# EAGLE board CT_schematic (EAGLE 7.6.0)

Size 100 x 80 mm. Coordinates in mm from the lower left corner, seen from the top.
Outline: 0,0 100,0 100,80 0,80 0,0
Copper layers (1*16): Top 0.035mm / dielectric 1.5mm / Bottom 0.035mm
Design rules "default": minimum track width 10mil, minimum drill 24mil, track to track 8mil, track to pad 8mil, pad to pad 8mil, via to via 8mil, smd to smd 8mil, copper to edge 40mil, drill to drill 8mil, minimum pad ring 10mil, minimum via ring 8mil, stop-mask expansion 4mil, vias tented up to drill 0mil, thermal gap 10mil

## Footprints (pad centres in the part's own frame; a part is rotated, then mirrored left to right if it is on the bottom)
C0603 = smd 0.8 x 0.8: 1 -0.762,0; 2 0.762,0
C0402 = smd 0.5 x 0.5: 1 -0.508,0; 2 0.508,0
C0805 = smd 1.2 x 1.3: 1 -1.016,0; 2 1.016,0
EXV-9B = smd 2.718 x 1.778: 1 -2.108,0; 2 2.108,0
EXV-9H = smd 3.505 x 1.676: 1 -2.857,0; 2 2.857,0
PJ-037B_PACKAGE = drill 3.7 square: 1 12,0 | drill 3.2 square: 2 6,0
R0603 = smd 0.8 x 0.8: 1 -0.762,0; 2 0.762,0
UFBGA100 = smd 0.28 x 0.28: A1 -2.75,2.75; A2 -2.25,2.75; A3 -1.75,2.75; A4 -1.25,2.75; A5 -0.75,2.75; A6 -0.25,2.75; A7 0.25,2.75; A8 0.75,2.75; A9 1.25,2.75; A10 1.75,2.75; A11 2.25,2.75; A12 2.75,2.75; B1 -2.75,2.25; B2 -2.25,2.25; B3 -1.75,2.25; B4 -1.25,2.25; B5 -0.75,2.25; B6 -0.25,2.25; B7 0.25,2.25; B8 0.75,2.25; B9 1.25,2.25; B10 1.75,2.25; B11 2.25,2.25; B12 2.75,2.25; C1 -2.75,1.75; C2 -2.25,1.75; C3 -1.75,1.75; C4 -1.25,1.75; C5 -0.75,1.75; C8 0.75,1.75; C9 1.25,1.75; C10 1.75,1.75; C11 2.25,1.75; C12 2.75,1.75; D1 -2.75,1.25; D2 -2.25,1.25; D3 -1.75,1.25; D10 1.75,1.25; D11 2.25,1.25; D12 2.75,1.25; E1 -2.75,0.75; E2 -2.25,0.75; E3 -1.75,0.75; E10 1.75,0.75; E11 2.25,0.75; E12 2.75,0.75; F1 -2.75,0.25; F2 -2.25,0.25; F11 2.25,0.25; F12 2.75,0.25; G1 -2.75,-0.25; G2 -2.25,-0.25; G11 2.25,-0.25; G12 2.75,-0.25; H1 -2.75,-0.75; H2 -2.25,-0.75; H3 -1.75,-0.75; H10 1.75,-0.75; H11 2.25,-0.75; H12 2.75,-0.75; J1 -2.75,-1.25; J2 -2.25,-1.25; J3 -1.75,-1.25; J10 1.75,-1.25; J11 2.25,-1.25; J12 2.75,-1.25; K1 -2.75,-1.75; K2 -2.25,-1.75; K3 -1.75,-1.75; K4 -1.25,-1.75; K5 -0.75,-1.75; K8 0.75,-1.75; K9 1.25,-1.75; K10 1.75,-1.75; K11 2.25,-1.75; K12 2.75,-1.75; L1 -2.75,-2.25; L2 -2.25,-2.25; L3 -1.75,-2.25; L4 -1.25,-2.25; L5 -0.75,-2.25; L6 -0.25,-2.25; L7 0.25,-2.25; L8 0.75,-2.25; L9 1.25,-2.25; L10 1.75,-2.25; L11 2.25,-2.25; L12 2.75,-2.25; M1 -2.75,-2.75; M2 -2.25,-2.75; M3 -1.75,-2.75; M4 -1.25,-2.75; M5 -0.75,-2.75; M6 -0.25,-2.75; M7 0.25,-2.75; M8 0.75,-2.75; M9 1.25,-2.75; M10 1.75,-2.75; M11 2.25,-2.75; M12 2.75,-2.75
MOLEX_47219-2001 = smd 0.8 x 1.5: 1 3.2,-2.1; 2 2.1,-2.1; 3 1,-2.1; 4 -0.1,-2.1; 5 -1.2,-2.1; 6 -2.3,-2.1; 7 -3.4,-2.1; 8 -4.5,-2.1 | smd 1.5 x 2.05: G1 6.875,-4.7; G2 6.875,3.6; G3 -6.875,3.6; G4 -6.875,-4.7
ATBTLC1000-MR110CA = smd 2 x 0.5: 1 -7.2,2.7; 2 -7.2,1.8; 3 -7.2,0.9; 4 -7.2,0; 5 -7.2,-0.9; 6 -7.2,-1.8; 7 -7.2,-2.7; 8 -7.2,-3.6; 17 3.6,-3.6; 18 3.6,-2.7; 19 3.6,-1.8; 20 3.6,-0.9; 21 3.6,0; 22 3.6,0.9; 23 3.6,1.8; 24 3.6,2.7 | smd 0.5 x 2: 9 -4.255,-6.824; 10 -3.355,-6.824; 11 -2.455,-6.824; 12 -1.555,-6.824; 13 -0.655,-6.824; 14 0.245,-6.824; 15 1.145,-6.824; 16 2.045,-6.824 | smd 2.7 x 2.7: 25 -1.261,-0.328
WFDN-8 = smd 0.48 x 0.7: 1 0,0; 2 1.27,0; 3 2.54,0; 4 3.81,0; 5 3.81,4.45; 6 2.54,4.45; 7 1.27,4.45; 8 0,4.45 | smd 4 x 3: 9 1.89,2.25
ABS07-32.768KHZ-7-T = smd 1.1 x 2.4: 1 -2.5,0; 2 0,0
ASFL1 = smd 1.7 x 1.5: 1 -1.27,-1.1; 2 1.27,-1.1; 3 1.27,1.1; 4 -1.27,1.1
LP2954 = smd 1.6 x 0.6: 1 -2.475,1.905 | smd 1.55 x 0.6: 2 -2.475,0.635; 3 -2.475,-0.635; 4 -2.475,-1.905; 5 2.475,-1.905; 6 2.475,-0.635; 7 2.475,0.635; 8 2.475,1.905
SON-6 = smd 0.55 x 0.3: 1 -0.355,0.5 | smd 0.52 x 0.3: 2 -0.37,0; 3 -0.37,-0.5; 4 0.37,-0.5; 5 0.37,0; 6 0.37,0.5
SW_4-1437565-2 = smd 1.4 x 2.1: 1 -2.23,4.55; 2 -2.23,-4.55; 3 2.23,4.55; 4 2.23,-4.55
LGM67K-G1J2-24-Z = smd 0.8 x 1.4: A -2,0; C 0,0
NC7SZ125M5X = smd 1.3 x 0.7: 1 -1.3,0.95; 2 -1.3,0; 3 -1.3,-0.95; 4 1.3,-0.95; 5 1.3,0.95
DUMMY_PACKAGE_132 = drill 0.3: 1 0,-1; 2 1.5,-1

## Placement (x,y rotation side)
C1  1e-06  [C0603]  -22.86,64.77 0 top  (outside the outline)
C2  1e-07  [C0603]  -26.67,64.77 0 top  (outside the outline)
C3  1e-07  [C0603]  -30.48,64.77 0 top  (outside the outline)
C4  1e-07  [C0603]  -34.29,64.77 0 top  (outside the outline)
C5  1e-07  [C0603]  -38.1,64.77 0 top  (outside the outline)
C6  1e-07  [C0603]  -41.91,64.77 0 top  (outside the outline)
C7  1e-07  [C0603]  -45.72,64.77 0 top  (outside the outline)
C8  4.7e-06  [C0603]  -19.05,64.77 0 top  (outside the outline)
C9  1e-08  [C0603]  -49.53,64.77 0 top  (outside the outline)
C10  1e-06  [C0603]  -53.34,64.77 0 top  (outside the outline)
C11  1e-11  [C0402]  -68.58,64.77 0 top  (outside the outline)
C12  1e-11  [C0402]  -15.24,69.85 0 top  (outside the outline)
C13  1e-07  [C0402]  -19.05,69.85 0 top  (outside the outline)
C14  1e-05  [C0805]  -15.24,54.61 0 top  (outside the outline)
C15  1e-05  [C0805]  -20.32,54.61 0 top  (outside the outline)
C16  1e-05  [C0805]  -25.4,54.61 0 top  (outside the outline)
C17  1e-07  [C0402]  -22.86,69.85 0 top  (outside the outline)
C18  1e-08  [C0402]  -26.67,69.85 0 top  (outside the outline)
C19  1e-06  [EXV-9B]  -49.53,46.99 0 top  (outside the outline)
C20  2.2e-06  [EXV-9B]  -58.42,46.99 0 top  (outside the outline)
C21  1e-07  [C0402]  -30.48,69.85 0 top  (outside the outline)
C22  0.0001  [EXV-9H]  -52.07,38.1 0 top  (outside the outline)
C23  0.0001  [EXV-9H]  -63.5,38.1 0 top  (outside the outline)
C24  1e-08  [C0402]  -34.29,69.85 0 top  (outside the outline)
J1  PJ-037B  [PJ-037B_PACKAGE]  -69.85,7.62 0 top  (outside the outline)
R2  1000.0  [R0603]  -57.15,64.77 0 top  (outside the outline)
R4  4700.0  [R0603]  -60.96,64.77 0 top  (outside the outline)
R5  10000.0  [R0603]  -50.8,59.69 0 top  (outside the outline)
R6  100000.0  [R0603]  -35.56,54.61 0 top  (outside the outline)
R7  100000.0  [R0603]  -40.64,54.61 0 top  (outside the outline)
R8  100000.0  [R0603]  -45.72,54.61 0 top  (outside the outline)
R9  100000.0  [R0603]  -50.8,54.61 0 top  (outside the outline)
R10  100000.0  [R0603]  -55.88,54.61 0 top  (outside the outline)
R11  100000.0  [R0603]  -60.96,54.61 0 top  (outside the outline)
R12  10000.0  [R0603]  -55.88,59.69 0 top  (outside the outline)
R13  10000.0  [R0603]  -60.96,59.69 0 top  (outside the outline)
R14  100000.0  [R0603]  -66.04,54.61 0 top  (outside the outline)
R15  100000.0  [R0603]  -15.24,59.69 0 top  (outside the outline)
R16  100000.0  [R0603]  -20.32,59.69 0 top  (outside the outline)
R17  100000.0  [R0603]  -25.4,59.69 0 top  (outside the outline)
R18  100000.0  [R0603]  -30.48,59.69 0 top  (outside the outline)
R19  164658.62  [R0603]  -30.48,54.61 0 top  (outside the outline)
R20  100000.0  [R0603]  -35.56,59.69 0 top  (outside the outline)
R21  10000.0  [R0603]  -66.04,59.69 0 top  (outside the outline)
R22  10000.0  [R0603]  -15.24,64.77 0 top  (outside the outline)
R23  9100.0  [R0603]  -64.77,64.77 0 top  (outside the outline)
R24  680000.0  [R0603]  -40.64,59.69 0 top  (outside the outline)
R25  120000.0  [R0603]  -45.72,59.69 0 top  (outside the outline)
U1  STM32L431VCI6  [UFBGA100]  -44.45,27.94 0 top  (outside the outline)
U2  0472192001  [MOLEX_47219-2001]  -44.45,8.89 0 top  (outside the outline)
U3  ATBTLC1000-MR110CA  [ATBTLC1000-MR110CA]  -17.78,8.89 0 top  (outside the outline)
U4  SST26VF032B-104I/MF  [WFDN-8]  -66.04,25.4 0 top  (outside the outline)
U5  ABS07-32.768KHZ-7-T  [ABS07-32.768KHZ-7-T]  -27.94,48.26 0 top  (outside the outline)
U6  ASFL1-25MHZ-NCS  [ASFL1]  -43.18,38.1 0 top  (outside the outline)
U7  LP2954AIMX/NOPB  [LP2954]  -25.4,39.37 0 top  (outside the outline)
U8  TPS3895ADRYR  [SON-6]  -41.91,68.58 0 top  (outside the outline)
U9  4-1437565-2  [SW_4-1437565-2]  -27.94,27.94 0 top  (outside the outline)
U10  Q65110A2395  [LGM67K-G1J2-24-Z]  -36.83,46.99 0 top  (outside the outline)
U11  nc7sz125m5x  [NC7SZ125M5X]  -66.04,45.72 0 top  (outside the outline)
U12  Dummy  [DUMMY_PACKAGE_132]  -39.37,69.85 0 top  (outside the outline)

## Library data of the parts
C1-C24 J1 R2 R4-R25 U1-U12 = circuit_tree

## Nets
CLK_CRYSTAL_U1_D1: C11.1 U1.D1 U5.1
CLK_CRYSTAL_U1_E1: C12.1 U1.E1 U5.2
CLK_U1_F1: U1.F1 U6.3
GND: C1.2 C2.2 C3.2 C4.2 C5.2 C6.2 C7.2 C8.2 C9.2 C10.2 C11.2 C12.2 C13.2 C14.2 C15.2 C16.2 C17.2 C18.2 C19.2 C20.2 C21.2 C22.2 C23.2 C24.2 J1.2 R2.2 R5.2 R20.2 R23.2 R25.2 U1.D3 U1.E3 U1.F2 U1.F11 U1.F12 U1.J1 U1.K1 U2.6 U2.G1 U2.G2 U2.G3 U2.G4 U3.1 U3.9 U3.13 U3.24 U3.25 U4.4 U4.9 U6.2 U7.4 U8.2 U10.C U11.1 U11.3 U12.1
NET_U1_A4: R5.1 U1.A4
NET_U1_H2: R4.1 U1.H2 U11.4
NET_U1_M1: U1.L1 U1.M1
NET_U1_M11: U10.A
NET_U1_M12: U9.3 U9.4
NET_U3_17: R12.1 U3.17
NET_U3_20: R13.1 U3.20
NET_U7_3: R18.1 U7.3
NET_U7_5: R17.1 U7.5
NET_U7_7: R19.2 R20.1 U7.7
NET_U8_1: R22.1 R23.1 U8.1
NET_U8_3: R24.2 R25.1 U8.3
NET_U8_4: R21.1 U8.4 U11.2
NET_U9_1: R2.1 U9.1 U9.2
PROC_DAC1_OUT2: U1.K4 U12.2
PROC_QUADSPI_BK1_IO0: U1.L9 U4.5
PROC_QUADSPI_BK1_IO1: U1.M5 U4.2
PROC_QUADSPI_BK1_IO2: R15.1 U1.M4 U4.3
PROC_QUADSPI_BK1_NCS: R14.1 U1.K3 U4.1
PROC_QUADSPI_BK2_IO3: R16.1 U1.A5 U4.7
PROC_QUADSPI_CLK: U1.L3 U4.6
PROC_SDMMC1_CK: R7.1 U1.B10 U2.5
PROC_SDMMC1_CMD: R6.1 U1.C8 U2.3
PROC_SDMMC1_D0: R8.1 U1.E10 U2.7
PROC_SDMMC1_D1: R9.1 U1.D12 U2.8
PROC_SDMMC1_D2: R10.1 U1.B11 U2.1
PROC_SDMMC1_D3: R11.1 U1.C10 U2.2
PROC_SPI1_MISO: U1.A7 U3.14
PROC_SPI1_MOSI: U1.A12 U3.11
PROC_SPI1_NSS: U1.A9 U3.12
PROC_SPI1_SCK: U1.A8 U3.10
VCC_S1_14V1: C19.1 C22.1 C23.1 J1.1 R18.2 U7.8
VCC_TIER1_3V3: C1.1 C2.1 C3.1 C4.1 C5.1 C6.1 C7.1 C8.1 C9.1 C10.1 C13.1 C14.1 C15.1 C16.1 C17.1 C18.1 C20.1 C21.1 C24.1 R4.2 R6.2 R7.2 R8.2 R9.2 R10.2 R11.2 R12.2 R13.2 R14.2 R15.2 R16.2 R17.2 R19.1 R21.2 R22.2 R24.1 U1.C4 U1.C11 U1.E2 U1.G2 U1.G11 U1.G12 U1.H3 U1.M1 U2.4 U3.6 U3.22 U4.8 U6.4 U7.1 U8.6 U11.5

## Tracks (layer width: path | path; a pad name or v marks a point on that pad's centre or on a via)
CLK_CRYSTAL_U1_D1  (2 unrouted)
CLK_CRYSTAL_U1_E1  (2 unrouted)
CLK_U1_F1  (1 unrouted)
GND  (55 unrouted)
NET_U1_A4  (1 unrouted)
NET_U1_H2  (2 unrouted)
NET_U1_M1  (1 unrouted)
NET_U1_M12  (1 unrouted)
NET_U3_17  (1 unrouted)
NET_U3_20  (1 unrouted)
NET_U7_3  (1 unrouted)
NET_U7_5  (1 unrouted)
NET_U7_7  (2 unrouted)
NET_U8_1  (2 unrouted)
NET_U8_3  (2 unrouted)
NET_U8_4  (2 unrouted)
NET_U9_1  (2 unrouted)
PROC_DAC1_OUT2  (1 unrouted)
PROC_QUADSPI_BK1_IO0  (1 unrouted)
PROC_QUADSPI_BK1_IO1  (1 unrouted)
PROC_QUADSPI_BK1_IO2  (2 unrouted)
PROC_QUADSPI_BK1_NCS  (2 unrouted)
PROC_QUADSPI_BK2_IO3  (2 unrouted)
PROC_QUADSPI_CLK  (1 unrouted)
PROC_SDMMC1_CK  (2 unrouted)
PROC_SDMMC1_CMD  (2 unrouted)
PROC_SDMMC1_D0  (2 unrouted)
PROC_SDMMC1_D1  (2 unrouted)
PROC_SDMMC1_D2  (2 unrouted)
PROC_SDMMC1_D3  (2 unrouted)
PROC_SPI1_MISO  (1 unrouted)
PROC_SPI1_MOSI  (1 unrouted)
PROC_SPI1_NSS  (1 unrouted)
PROC_SPI1_SCK  (1 unrouted)
VCC_S1_14V1  (5 unrouted)
VCC_TIER1_3V3  (51 unrouted)